# Altium PCB HV_Indicator.PcbDoc
Units mil, origin at the board's own origin, x right, y up, seen from the top; angles counter-clockwise.
Board outline 5515 x 2385 mil, 2 copper layers (Top Layer, Bottom Layer); 24 components, 19 nets, 74 pads, 0 vias.
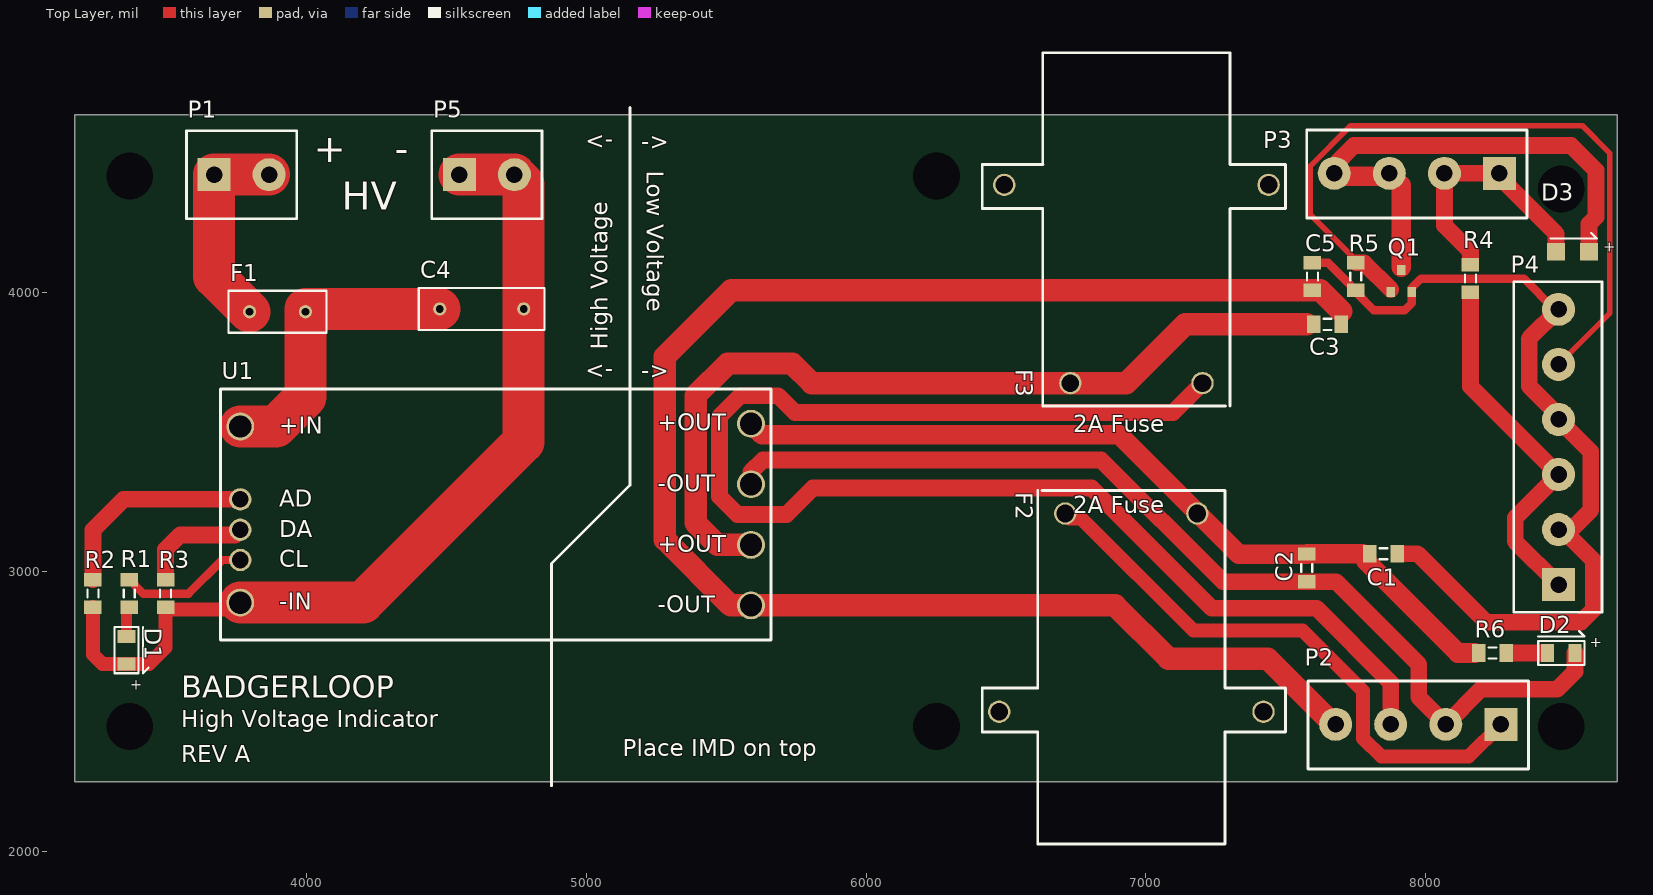
[diagram p0: Top Layer view]
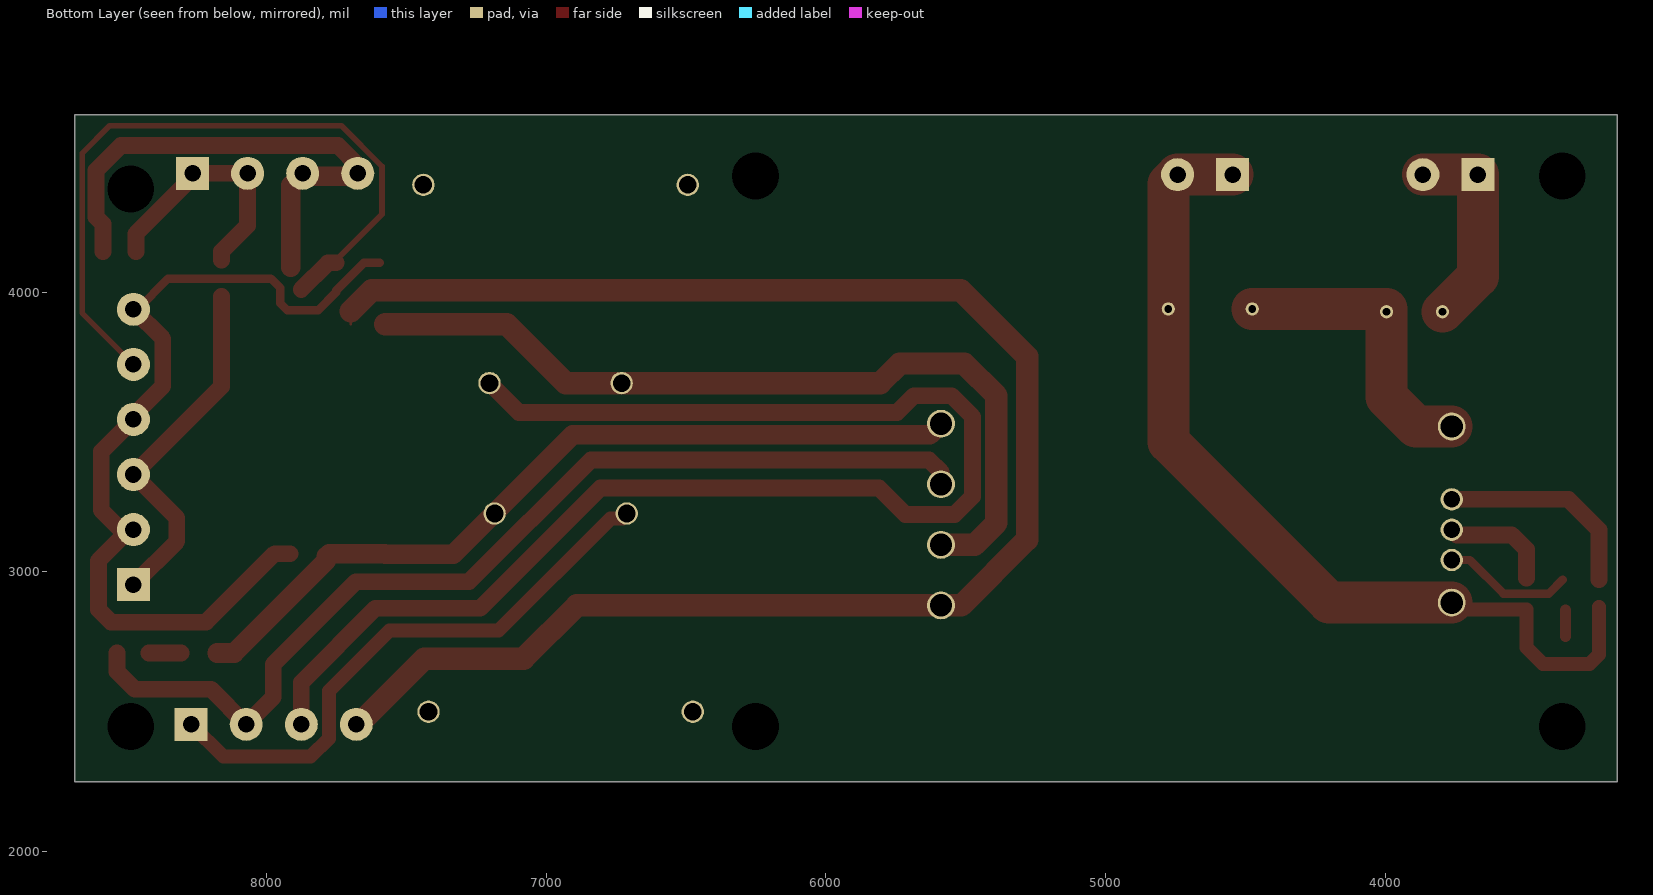
[diagram p1: Bottom Layer view, seen from below]

## Layer stack, top to bottom
Top Solder: solder mask 0.4, Solder Resist, Dk 3.5
Top Layer: signal copper 1.4
Dielectric 1: dielectric 12.6, FR-4, Dk 4.8
Bottom Layer: signal copper 1.4
Bottom Solder: solder mask 0.4, Solder Resist, Dk 3.5

## Board outline
3170,2250 8685,2250 8685,4610 8685,4620 8685,4635 3170,4635

## Design rules (kind name [scope] priority, off if disabled: settings)
Clearance [All] p1: gap=10 ignorepadtopadclearanceinfootprint=FALSE except(0: Arc-Hole Track-Hole SMDPad-Hole THPad-Hole Via-Hole Fill-Hole Poly-Hole Region-Hole Text-Hole)
PolygonConnect [All] p1: connectstyle=Relief reliefconductorwidth=10 reliefentries=4 polygonreliefangle="90 Angle" airgapwidth=10
RoomDefinition HV_Indicator [InComponentClass('HV_Indicator')] p1: confinementstyle=ConfineIn formatcopy=TRUE lockcomponents=FALSE outline 3170,1680 8860,1680 8860,5095 3170,5095
RoutingVias [All] p1: holewidth=28 width=50 viastyle="Through Hole" minholewidth=28 minwidth=50 maxholewidth=28 maxwidth=50
SolderMaskExpansion [All] p1: expansion=4
Width [All] p1: maxlimit=200 minlimit=10 preferedwidth=10 minimp=50.000000 maximp=50.000000 favimp=50.000000
30 further rules are at their usual default settings.

## Components (designator, comment, footprint, x,y, rotation, side; value= is the part's Value field where it differs from the comment)
C1 "Cap" 1206 7800,3065 r0 top value=100pF
C2 "Cap" 1206 7575,2965 r90 top value=100pF
C3 "Cap" 1206 7698.43,3885 r180 top value=100pF
C4 "Cap" RAD-0.3 4625,3940 r180 top value=0.22uF
C5 "Cap" 1206 7595,4105 r270 top value=100pF
D1 "LED1" "1206 DIODE" 3355,2720 r270 top
D2 "LED1" "1206 DIODE" 8485,2710 r0 top
D3 "LED0" "1206 LED" 8525,4145 r0 top
F1 "283-2770-ND" RAD-0.2 3895,3930 r0 top
F2 "Fuse 1" FUSEHOLDER 7183.78,3208.66 r180 top
F3 "Fuse 1" FUSEHOLDER 6729.67,3675 r0 top
P1 "Header 2" "2POS TERM BLOCK" 3668.15,4420 r0 top
P2 "Header 4" "4POS TERM BLOCK" 8268.7,2455 r180 top
P3 "Header 4" "4POS TERM BLOCK" 8263.7,4425 r180 top
P4 "Header 6" "6POS TERM BLOCK" 8475,2954.45 r90 top
P5 "Header 2" "2POS TERM BLOCK" 4545,4420 r0 top
Q1 "MOSFET-N" SOT-23-3 7912.6,4079.41 r0 top
R1 "Res1" 1206 3365,2972.13 r270 top value=1K
R2 "Res1" 1206 3235,2873.7 r90 top value=0
R3 "Res1" 1206 3495,2873.7 r90 top value=0
R4 "Res1" 1206 8160,4098.43 r270 top value=10K
R5 "Res1" 1206 7750,4006.57 r90 top value=10K
R6 "Res1" 1206 8190,2710 r0 top value=1K
U1 "DC-DC Converter" DCM290Y138X600A40 4675,3205 r0 top

## Footprints (in the part's own frame and the unit in brackets; to place one, negate y for a bottom-side part, rotate by r counter-clockwise, add the part's x,y. Pads: shape width x height; smd on the part's side, far side on the other; paste and mask are expansions set on the pad)
"2POS TERM BLOCK" [mm] "5mm Pitch"
  rect 3x3 hole 1.5: 1(0,0)
  round 3 hole 1.5: 2(5,0)
  silkscreen extent -2.5,-4 7.5,4, body extent -2.51,-4.57 8.09,4.43, height 12.6
"4POS TERM BLOCK" [mm]
  rect 3x3 hole 1.5: 1(0,0)
  round 3 hole 1.5: 2(5,0) 3(10,0) 4(15,0)
  silkscreen extent -2.5,-3.94 17.5,4.06, body extent -2.55,-4.55 18.05,4.45, height 3.8
"6POS TERM BLOCK" [mm] "5mm"
  rect 3x3 hole 1.5: 1(0,0)
  round 3 hole 1.5: 2(5,0) 3(10,0) 4(15,0) 5(20,0) 6(25,0)
  silkscreen extent -2.5,-3.94 27.5,4.06, body extent -3.11,-4.55 27.49,4.45, height 12.87
1206 [mm] "1206 SMD Resistor"
  rect 1.2x1.6 smd: 1(0,0) 2(2.5,0)
  silkscreen extent 0.9,-0.5 1.6,0.5
"1206 DIODE" [mm]
  rect 1.2x1.6 smd: 1(-1.25,0) 2(1.25,0)
  silkscreen extent -2.1,-1.1 2.1,2, body extent -1.4,-0.8 1.5,0.8, height 1
"1206 LED" [mm]
  rect 1.6x1.6 smd: 1(-1.5,0) 2(1.5,0)
  silkscreen extent -2,1.2 2.2,1.7, body extent -1.4,-0.8 1.5,0.8, height 1
DCM290Y138X600A40 [mm]
  round 2.53 hole 2.03: 0(-23.19,8) 4(-23.19,-8) 5(23.19,8.25) 6(23.19,2.75) 7(23.19,-2.75) 8(23.19,-8.25)
  round 2.03 hole 1.52: 1(-23.19,1.38) 2(-23.19,-1.38) 3(-23.19,-4.13)
  silkscreen extent -25,-11.4 25,11.4, body extent -25.02,-11.4 25.02,11.43, height 8.16
FUSEHOLDER [mm]
  round 2.032 hole 1.6: 0(-6,18) 0(18,18) 1(0,0) 2(12,0)
  silkscreen extent -8,-2.08 19.53,30, body extent -2.51,-2.08 14.53,30, height 6
RAD-0.2 [mm] "Radial Cap, Thru-Hole; 2 Leads; 0.2 in Pin Spacing"
  round 1.2 hole 0.7: 1(-2.54,0) 2(2.54,0)
  silkscreen extent -4.44,-1.91 4.44,1.91
RAD-0.3 [mm] "Radial Cap, Thru-Hole; 2 Leads; 0.3 in Pin Spacing"
  round 1.2 hole 0.7: 1(-3.81,0) 2(3.81,0)
  silkscreen extent -5.71,-1.91 5.71,1.91
SOT-23-3 [mm] "MOSFET"
  rect 0.8x0.9 smd: D(0,0) G(-0.95,-2) S(0.95,-2)

## Part data
C1 C2 C3 C4 C5: "Capacitor", LatestRevisionDate=17-Jul-2002, LatestRevisionNote="Re-released for DXP Platform.", PackageDescription="Radial Cap, Thru-Hole; 2 Leads; 0.3 in Pin Spacing", PackageReference=RAD-0.3, Published=8-Jun-2000, Publisher="Altium Limited"
D1 D2: "Typical RED GaAs LED", LatestRevisionDate=08-Jul-2005, LatestRevisionNote="Mech Layer 1 removed.", PackageDescription="LED; 2 Leads", PackageReference=LED-1, Published=8-Jun-2000, Publisher="Altium Limited"
D3: "Typical INFRARED GaAs LED", LatestRevisionDate=08-Jul-2005, LatestRevisionNote="Mech Layer 1 removed.", PackageDescription="LED; 2 Leads", PackageReference=LED-0, Published=8-Jun-2000, Publisher="Altium Limited"
F1: library part "Fuse 1", "Fuse", LatestRevisionDate=17-Jul-2002, LatestRevisionNote="Re-released for DXP Platform.", PackageDescription="Thru-Hole; 2 Leads", PackageReference=PIN-W2/E2.8, Published=8-Jun-2000, Publisher="Altium Limited"
F2 F3: "Fuse", LatestRevisionDate=17-Jul-2002, LatestRevisionNote="Re-released for DXP Platform.", PackageDescription="Thru-Hole; 2 Leads", PackageReference=PIN-W2/E2.8, Published=8-Jun-2000, Publisher="Altium Limited"
P1 P5: "Header, 2-Pin", LatestRevisionDate=17-Jul-2002, LatestRevisionNote="Re-released for DXP Platform.", Publisher="Altium Limited"
P2 P3: "Header, 4-Pin", LatestRevisionDate=17-Jul-2002, LatestRevisionNote="Re-released for DXP Platform.", Publisher="Altium Limited"
P4: "Header, 6-Pin", LatestRevisionDate=17-Jul-2002, LatestRevisionNote="Re-released for DXP Platform.", Publisher="Altium Limited"
Q1: "N-Channel MOSFET", LatestRevisionDate=17-Jul-2002, LatestRevisionNote="Re-released for DXP Platform.", PackageDescription="TO, Flat Index; 3 In-Line, Axial Leads; Body Dia. 4.6mm; Lead Dia. 0.5 mm (max)", PackageReference=E3, PackageVersion=1995/1996, Published=8-Jun-2000, Publisher="Altium Limited"
R1 R2 R3 R4 R5 R6: "Resistor", LatestRevisionDate=17-Jul-2002, LatestRevisionNote="Re-released for DXP Platform.", PackageDescription="Axial Device, Thru-Hole; 2 Leads; 0.3 in Pin Spacing", PackageReference=AXIAL-0.3, Published=8-Jun-2000, Publisher="Altium Limited"

## Free pads (board coordinates)
  round 60 hole 167.32 unplated: 6(3366.85,2446.85) 6(3366.85,4415.35) 6(6250.71,2446.85) 6(6250.71,4415.35) 6(8484.96,2446.85) 6(8484.96,4368.66)

## Nets (pads, with @x,y where several pads share a name; then routed paths per layer and width w, separated by ;. In a path a pad name is that pad's centre, name@x,y a point inside that pad or via, vN(x,y) a via of type N, cw(c..) or ccw(c..) an arc to the next point about the centre after c; other vN are vias at no path point)
GND: C1.2 C5.1 P4.2 P4.4 P4.6 Q1.S R5.1 | length 3234.6
  Top Layer w10: R5.1@7750,4000 R5.1 ; P4.6@8461.3,3938.7 P4.6 ; P4.2 P4.2@8488.7,3151.3 ; P4.4 P4.4@8490,3545
  Top Layer w30: C5.1 7651.57,4105 R5.1 ; R5.1@7750,4000 7815,3935 7925,3935 7950,3960 Q1.S 7950,4015 7983.62,4048.62 8351.38,4048.62 P4.6@8461.3,3938.7
  Top Layer w60: C1.2@7915,3065 7970,3065 8215,2820 8555,2820 8600,2865 8600,3040 8488.7,3151.3 8521.3,3151.3 8590,3220 8590,3430 P4.4 ; P4.6 8370,3833.7 8370,3665 P4.4@8490,3545
HV+: F1.1 P1.1 P1.2 | length 739.4
  Top Layer w150: F1.1 3668.15,4056.85 P1.1 P1.2
HV-: C4.1 D1.2 P5.1 P5.2 R2.1 R3.1 U1.4 | length 3296.5
  Top Layer w10: U1.4@3736.97,2865 U1.4
  Top Layer w50: R2.1 3235,2705 3269.21,2670.79 D1.2 3435.79,2670.79 3495,2730 3495,2865 U1.4@3736.97,2865
  Top Layer w150: U1.4 4200.04,2890.04 4775,3465 C4.1 4775,4386.85 P5.2 P5.1
IMD+: P4.5 Q1.G R5.2 | length 2581.1
  Top Layer w20: R5.2 7750,4115 7586.35,4278.65 7586.35,4450 7731.35,4595 8560,4595 8658.62,4496.38 8658.62,3925.47 P4.5
  Top Layer w60: R5.2 7780.2,4105 Q1.G@7875.2,4010
IndicatorLight1-: C2.1 D2.2 P2.2 U1.6 | length 3613.1
  Top Layer w60: U1.6 5587.99,3357.99 5630,3400 6840,3400 7275,2965 C2.1 7680,2965 7975,2670 7975,2551.85 P2.2 8196.85,2580 8470,2580 8534.21,2644.21 D2.2
IndicatorLight2-: C3.1 C5.2 P2.4 U1.8 | length 5920.6
  Top Layer w10: C3.1 7698.43,3931.57
  Top Layer w80: P2.4 7670,2455 7435,2690 7080,2690 6889.8,2880.2 U1.8 5514.8,2880.2 5280,3115 5280,3770 5516.57,4006.57 C5.2 7623.43,4006.57 7698.43,3931.57
NetC1_1: C1.1 C2.2 F2.1 R6.1 U1.5 | length 2936.7
  Top Layer w10: C2.2 C2.2@7576.57,3065
  Top Layer w70: U1.5 5627.8,3490 6905,3490 7331.57,3063.43 C2.2 ; C2.2@7576.57,3065 7775,3065 7785,3055 7785,3040 8115,2710 R6.1@8175,2710
NetC3_2: C3.2 F3.1 U1.7 | length 3034
  Top Layer w80: U1.7 5468.27,3096.73 5390,3175 5390,3630 5505,3745 5735,3745 5805,3675 F3.1 6930,3675 7140,3885 7575,3885
NetC4_2: C4.2 F1.2 U1.0 | length 1071.5
  Top Layer w150: U1.0 3889.96,3519.96 3995,3625 F1.2 3995,3940 C4.2
NetD1_1: D1.1 R1.2 | length 108.6
  Top Layer w10: R1.2@3355,2863.7 R1.2
  Top Layer w40: D1.1 R1.2@3355,2863.7
NetD2_1: D2.1 R6.2 | length 115
  Top Layer w60: R6.2@8305,2710 D2.1@8420,2710
NetD3_1: D3.1 P3.1 P3.2 R4.1 | length 909.2
  Top Layer w60: R4.1@8160,4115 8160,4145 8066.85,4238.15 P3.2 P3.1 8263.7,4411.3 8465.94,4209.06 D3.1
NetD3_2: D3.2 P3.3 P3.4 Q1.D | length 1884.6
  Top Layer w60: P3.4@7673.15,4415 P3.4 7673.15,4453.15 7744.06,4524.06 8520.23,4524.06 8608.62,4435.67 8608.62,4268.62 8584.06,4244.06 D3.2
  Top Layer w70: P3.4@7673.15,4415 7870,4415 7912.6,4382.4 Q1.D@7912.6,4088.74
NetF2_2: F2.2 P2.1 | length 2039.6
  Top Layer w50: F2.2@6727.44,3190 6770,3190 7170,2790 7560,2790 7776.57,2573.43 7776.57,2405 7841.57,2340 8153.7,2340 P2.1
NetF3_2: F3.2 P2.3 | length 5015.7
  Top Layer w60: F3.2 7097.11,3570 5745,3570 5685,3630 5550,3630 5475,3555 5475,3270 5540,3205 5715,3205 5810,3300 6805,3300 7235,2870 7610,2870 7875,2605 P2.3
NetR1_1: R1.1 U1.3 | length 467.4
  Top Layer w30: R1.1 3414.8,2922.32 3577.32,2922.32 3697.4,3042.4 U1.3
NetR2_2: R2.2 U1.1 | length 750.2
  Top Layer w60: R2.2 3235,3150 3344.33,3259.33 U1.1
NetR3_2: R3.2 U1.2 | length 399
  Top Layer w10: U1.2@3743.46,3132.13 U1.2
  Top Layer w60: R3.2@3495,2977.32 3495,3080 3547.13,3132.13 U1.2@3743.46,3132.13
POS12V: P4.1 P4.3 R4.2 | length 1289.4
  Top Layer w60: R4.2@8160,3985 8160,3663.15 P4.3 8320,3193.15 8320,3109.45 P4.1
pads on no net: F2.0 F3.0

## Silkscreen, mask and mechanical layers (free items; w line width, h text height)
Top Overlay:
  lines w10: 4875,2235 4875,3030 5155,3310 5155,4660
  text "->" at 5094.99,4565 h60 r180
  text "->" at 5195.01,4510 h60
  text "+" at 4025,4465 h100
  text "-" at 4315,4465 h100
  text "Low Voltage" at 5215,4435 h60 r270
  text "HV" at 4125,4295 h100
  text "High Voltage" at 5075,3795 h60 r90
  text "->" at 5094.99,3745 h60 r180
  text "->" at 5195.01,3690 h60
  text "2A Fuse" at 6740,3500 h60
  text "2A Fuse" at 6740,3210 h60
  text "BADGERLOOP" at 3550,2550 h80
  text "High Voltage Indicator" at 3550,2445 h60
  text "Place IMD on top" at 5130,2340 h60
  text "REV A" at 3550,2320 h60

## Text inside footprints (layer, text, board x,y; h text height)
D1: Top Overlay "+" at 3374.68,2617.64 h39.37 r270
D2: Top Overlay "+" at 8587.36,2729.68 h39.37
D3: Top Overlay "+" at 8635.24,4145 h39.37
U1: Top Overlay "+OUT" at 5254,3503.78 h60; Top Overlay "-OUT" at 5254,3287.25 h60; Top Overlay "+OUT" at 5254,3070.71 h60; Top Overlay "-OUT" at 5254,2854.18 h60; Top Overlay "-IN" at 3901,2864.02 h60; Top Overlay "CL" at 3901,3016.38 h60; Top Overlay "DA" at 3901,3124.65 h60; Top Overlay "AD" at 3901,3233.31 h60; Top Overlay "+IN" at 3901,3493.94 h60